# Altium PCB SDC-BSPD-rev2.PcbDoc (part 1 of 2)
Units mm, origin at the board's own origin, x right, y up, seen from the top; angles counter-clockwise.
Board outline 122.75 x 70 mm, 2 copper layers (Top Layer, Bottom Layer); 79 components, 51 nets, 243 pads, 65 vias.
Unrouted connection lines stored in the file: 1.
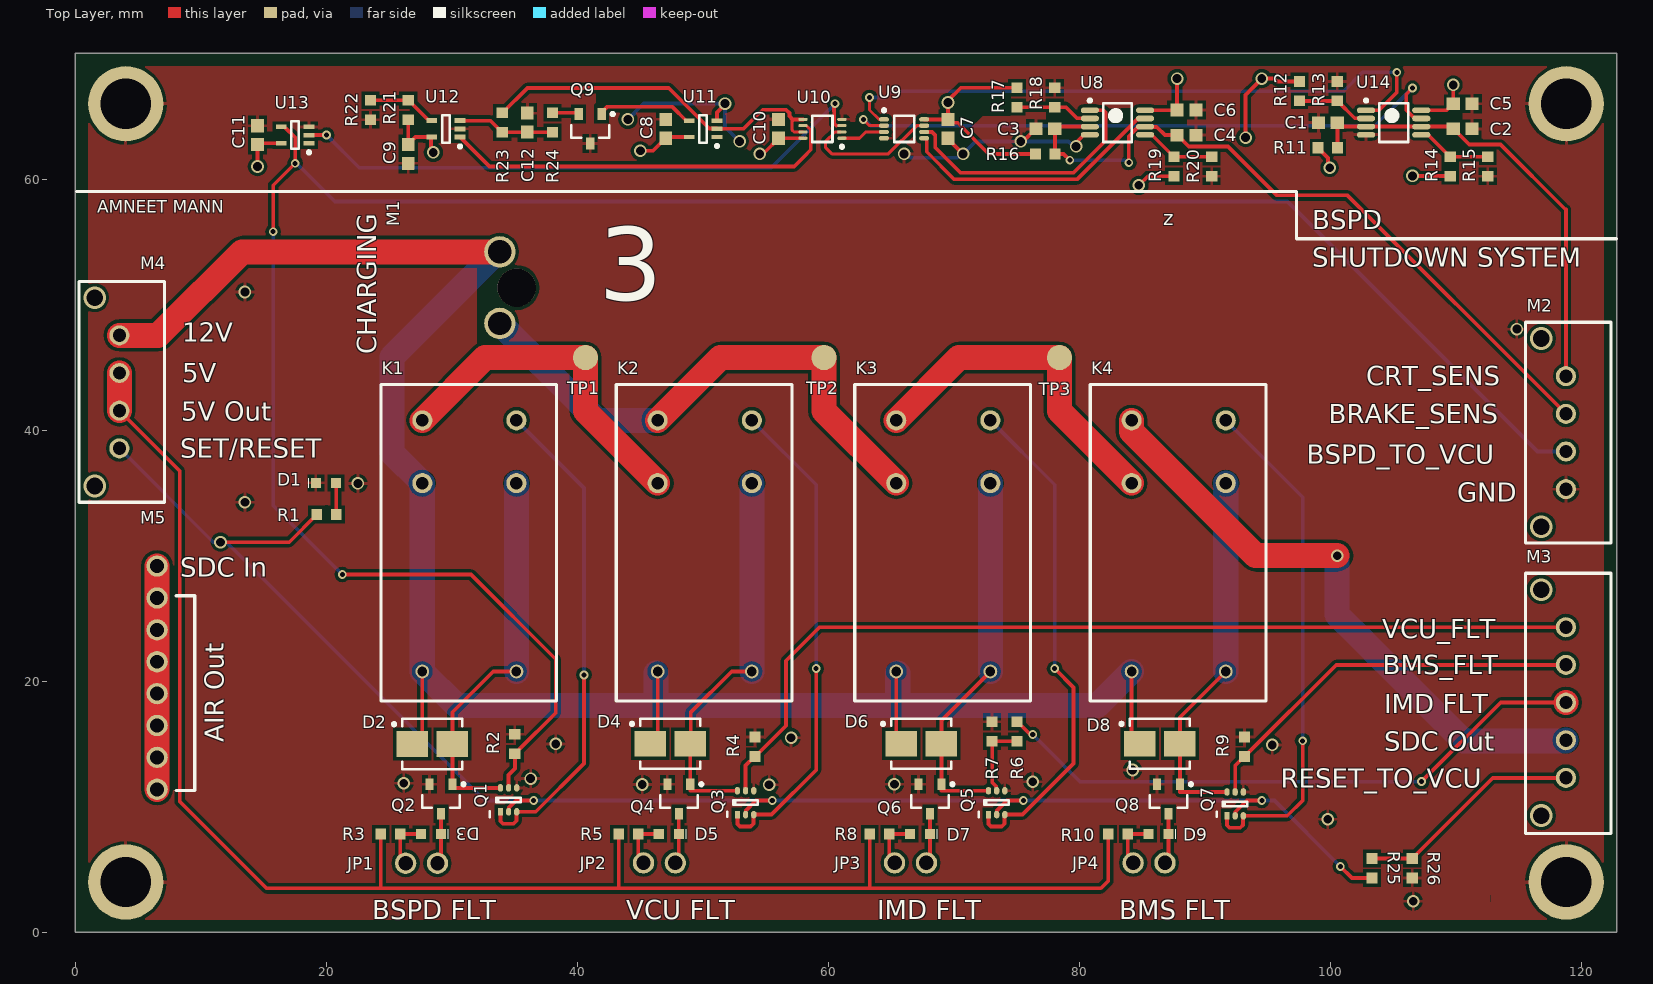
[diagram p0: Top Layer view]
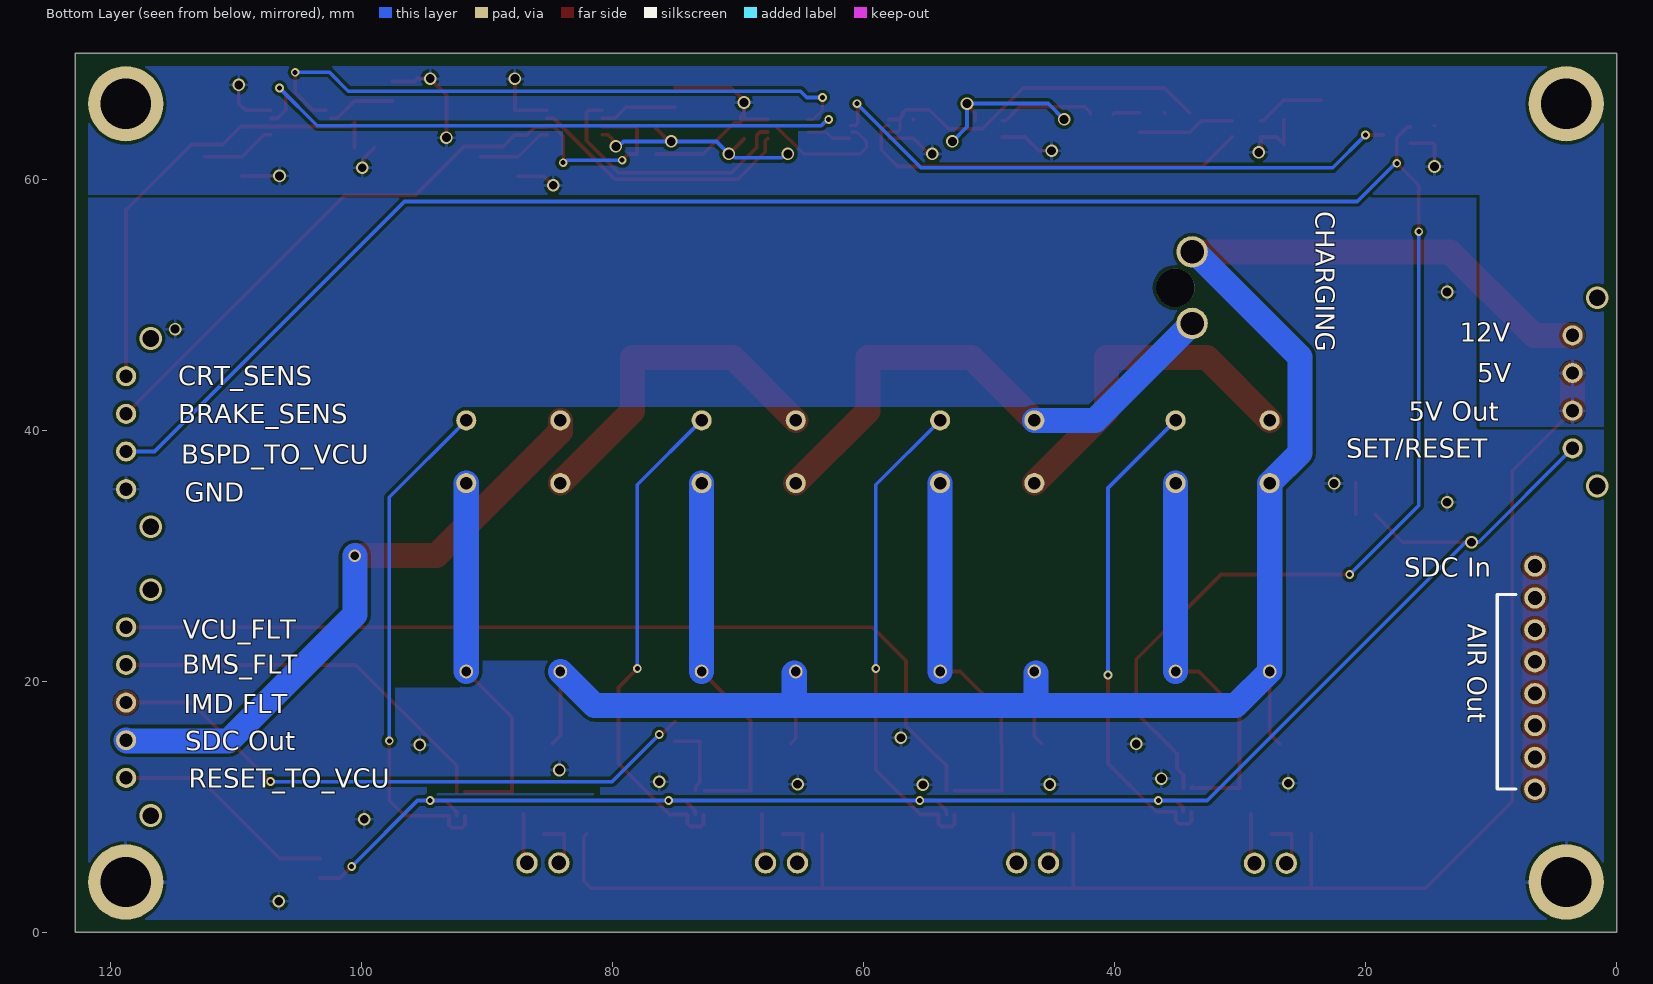
[diagram p1: Bottom Layer view, seen from below]
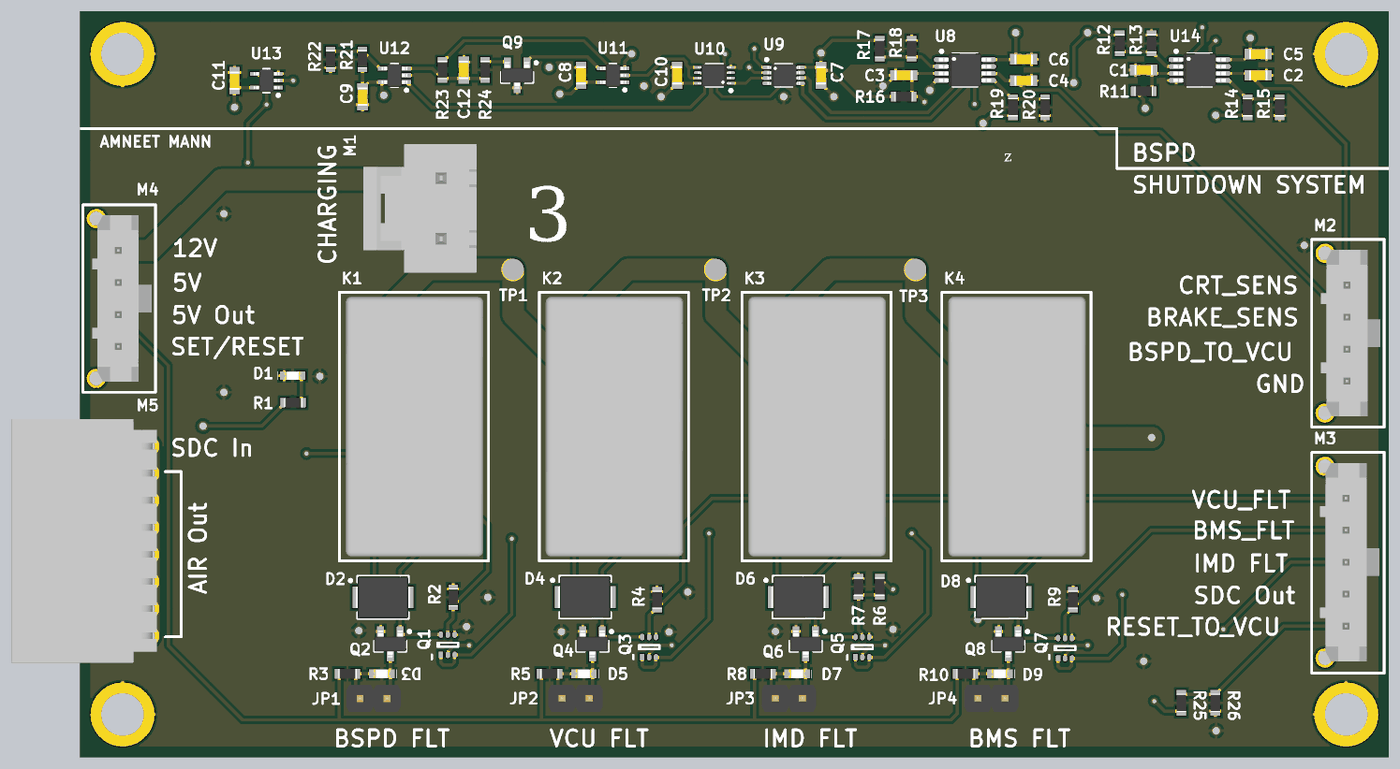
[diagram p2: 3D render of the assembled board from above, using the file's embedded part models]

## Layer stack, top to bottom
Top Solder: solder mask 0.0102, Solder Resist, Dk 3.5
Top Layer: signal copper 0.0356
Dielectric 1: dielectric 0.32, FR-4, Dk 4.8
Bottom Layer: signal copper 0.0356
Bottom Solder: solder mask 0.0102, Solder Resist, Dk 3.5

## Board outline
0,0 0,70 122.75,70 122.75,0

## Design rules (kind name [scope] priority, off if disabled: settings)
Clearance [All] p1: gap=0.254 ignorepadtopadclearanceinfootprint=FALSE except(0: Arc-Arc Arc-Track Arc-Hole Track-Track Track-Hole SMDPad-SMDPad SMDPad-Hole THPad-Hole Via-Hole Fill-Hole Poly-Hole Region-Hole Text-Hole; 0.1: Arc-SMDPad Track-SMDPad)
HoleSize [All] p1: absolutevalues=TRUE maxlimit=4 minlimit=0.025 maxpercent=80.000 minpercent=20.000
MinimumSolderMaskSliver [All] p1: minsoldermaskwidth=0
PolygonConnect [All] p1: connectstyle=Relief reliefconductorwidth=0.254 reliefentries=4 polygonreliefangle="90 Angle" airgapwidth=0.254
RoutingVias [All] p1: holewidth=0.4 width=0.7 viastyle="Through Hole" minholewidth=0.4 minwidth=0.7 maxholewidth=0.4 maxwidth=1
SolderMaskExpansion [All] p1: expansion=0.102
Width [All] p1: maxlimit=2 minlimit=0.25 preferedwidth=0.3
28 further rules are at their usual default settings.

## Classes and differential pairs
component class U_BSPD-rev2: C1 C2 C3 C4 C5 C6 C7 C8 C9 C10 C11 C12 Q9 R11 R12 R13 R14 R15 R16 R17 R18 R19 R20 R21 R22 R23 R24 U8 U9 U10 U11 U12 U13 U14
component class SDC-rev2: D1 D2 D3 D4 D5 D6 D7 D8 D9 JP1 JP2 JP3 JP4 K1 K2 K3 K4 M1 M2 M3 M4 M5 Q1 Q2 Q3 Q4 Q5 Q6 Q7 Q8 R1 R2 R3 R4 R5 R6 R7 R8 R9 R10 R25 R26 TP1 TP2 TP3

## Components (designator, comment, footprint, x,y, rotation, side; value= is the part's Value field where it differs from the comment)
C1 "100nF" CAP-0603 99.75,64.5 r0 top
C2 "100nF" CAP-0603 110.5,64 r180 top
C3 "100nF" CAP-0603 77.25,64 r0 top
C4 "100nF" CAP-0603 88.5,63.5 r180 top
C5 "100nF" CAP-0603 110.5,66 r180 top
C6 "100nF" CAP-0603 88.5,65.5 r180 top
C7 "100nF" CAP-0603 69.5,64 r270 top
C8 "100nF" CAP-0603 47,64 r270 top
C9 "100nF" CAP-0603 26.5,62 r270 top
C10 "100nF" CAP-0603 56,64 r270 top
C11 "100nF" CAP-0603 14.5,63.5 r270 top
C12 "15uF" CAP-0603 36,64.5 r270 top
D1 "Yellow" LED-0603 18.75,35 r0 top
D2 "100V" DO-214AA 28.425,15 r0 top
D3 "Red" LED-0603 29.51,8.621 r180 top
D4 "100V" DO-214AA 47.375,15.025 r0 top
D5 "Red" LED-0603 48.46,8.621 r180 top
D6 "100V" DO-214AA 67.375,15.025 r0 top
D7 "Red" LED-0603 68.46,8.621 r180 top
D8 "100V" DO-214AA 86.375,15.025 r0 top
D9 "Red" LED-0603 87.46,8.621 r180 top
JP1 "732-5315-ND" 2PIN-JP 28.833,5.5 r180 top
JP2 "732-5315-ND" 2PIN-JP 47.783,5.525 r180 top
JP3 "732-5315-ND" 2PIN-JP 67.783,5.525 r180 top
JP4 "732-5315-ND" 2PIN-JP 86.783,5.525 r180 top
K1 "5-1419124-6" "RELAY DPST SDC" 37.825,18.825 r90 top
K2 "5-1419124-6" "RELAY DPST SDC" 56.575,18.825 r90 top
K3 "5-1419124-6" "RELAY DPST SDC" 75.575,18.825 r90 top
K4 "5-1419124-6" "RELAY DPST SDC" 94.325,18.825 r90 top
M1 "2002411112" "2-PIN MOLEX" 33.8,54.2 r0 top
M2 "0436500428" "4-PIN MOLEX" 118.813,39.799 r270 top
M3 "043650052" "5-PIN MOLEX" 118.723,18.299 r270 top
M4 "0436500428" "4-PIN MOLEX" 3.59,43.05 r270 top
M5 "23-0705530112-ND" 8PIN 6.5,29.17 r270 top
Q1 "DMN63D1LDW" DMN63D1LDW 33.85,9.6 r90 top
Q2 "DMN6140L-13DICT-ND" SOT-23-3 29.11,10.616 r270 top
Q3 "DMN63D1LDW" DMN63D1LDW 52.725,9.375 r90 top
Q4 "DMN6140L-13DICT-ND" SOT-23-3 48.06,10.616 r270 top
Q5 "DMN63D1LDW" DMN63D1LDW 72.725,9.375 r90 top
Q6 "DMN6140L-13DICT-ND" SOT-23-3 68.06,10.616 r270 top
Q7 "DMN63D1LDW" DMN63D1LDW 91.725,9.275 r90 top
Q8 "DMN6140L-13DICT-ND" SOT-23-3 87.06,10.616 r270 top
Q9 "BSS138LT3G" SOT-23-3 41,64 r270 top
R1 "240" RES-0603 20,33.275 r180 top
R2 "10K" RES-0603 35,15 r90 top
R3 "240" RES-0603 25.093,7.821 r180 top
R4 "10K" RES-0603 54.125,14.775 r90 top
R5 "240" RES-0603 44.043,7.821 r180 top
R6 "1K" RES-0603 75,16 r270 top
R7 "1K" RES-0603 73,16 r90 top
R8 "240" RES-0603 64.043,7.821 r180 top
R9 "10K" RES-0603 93.125,14.775 r90 top
R10 "240" RES-0603 83.043,7.821 r180 top
R11 "10K" RES-0603 99.75,62.5 r180 top
R12 "1K" RES-0603 97.5,67 r90 top
R13 "3K" RES-0603 100.5,67 r270 top
R14 "9.1K" RES-0603 109.5,61 r270 top
R15 "3K" RES-0603 112.5,61 r90 top
R16 "10K" RES-0603 77.25,62 r180 top
R17 "1K" RES-0603 75,66.5 r90 top
R18 "9.1K" RES-0603 78,66.5 r270 top
R19 "7.5K" RES-0603 87.5,61 r270 top
R20 "3K" RES-0603 90.5,61 r90 top
R21 "1.3K" RES-0603 26.5,65.5 r270 top
R22 "2.2K" RES-0603 23.5,65.5 r90 top
R23 "33K" RES-0603 34,64.5 r270 top
R24 "499" RES-0603 38,64.5 r270 top
R25 "1K" RES-0603 103.275,5.1 r270 top
R26 "2K" RES-0603 106.475,5.1 r90 top
TP1 "Testpoint2" TP2 40.625,45.775 r0 top
TP2 "Testpoint2" TP2 59.625,45.775 r0 top
TP3 "Testpoint2" TP2 78.375,45.775 r0 top
U8 "TLV3202AIDGK" TLV3202AIDGK 83,64.5 r0 top
U9 "NL27WZ32USGOSCT-ND" TSSOP50P310X90-8N 66,64 r0 top
U10 "SN74LVC2G08DCUT" SN74LVC2G08DCU 59.5,64 r180 top
U11 "SN74AHC1G04DCK" SN74AHC1G04DCK 50,64 r180 top
U12 "TLV3201AIDCKR" TLV3201AIDCK 29.5,64 r180 top
U13 "SN74AHC1G04DCK" SN74AHC1G04DCK 17.5,63.5 r180 top
U14 "TLV3202AIDGK" TLV3202AIDGK 105,64.5 r0 top

## Footprints (in the part's own frame and the unit in brackets; to place one, negate y for a bottom-side part, rotate by r counter-clockwise, add the part's x,y. Pads: shape width x height; smd on the part's side, far side on the other; paste and mask are expansions set on the pad)
"2-PIN MOLEX" [mm]
  round 2.5 hole 1.85: 1(0,0) 2(0,-5.7)
  round 3.05 hole 3.05: ""(1.34,-2.85)
  body extent -7.2,-8.72 3.4,3.33, height 17.49
2PIN-JP [mm]
  round 1.7 hole 1.15: 1(0,0) 2(2.54,0)
  body extent -1.24,-1.27 3.84,1.27, height 8.57
"4-PIN MOLEX" [mm]
  round 1.6 hole 1.06: 1(-4.5,-0.09) 2(-1.5,-0.09) 3(1.5,-0.09) 4(4.5,-0.09)
  silkscreen extent -8.8,-3.3 8.8,3.5, body extent -7.82,-2.47 7.83,3.14, height 9.95
"5-PIN MOLEX" [mm]
  round 1.6 hole 1.06: 1(-6,0) 2(-3,0) 3(0,0) 4(3,0) 5(6,0)
  silkscreen extent -10.3,-3.21 10.43,3.59, body extent -9.32,-2.47 9.32,3.14, height 9.95
8PIN [mm]
  round 1.7 hole 1.11: 1(0,0) 2(2.54,0) 3(5.08,0) 4(7.62,0) 5(10.16,0) 6(12.7,0) 7(15.24,0) 8(17.78,0)
  body extent -2.56,-12.89 20.3,0.7, height 7.06
CAP-0603 [mm] "Chip Capacitor, 2-Leads, Body 1.60x0.80mm, IPC Medium Density"
  rect 1.05x1 smd: 1(-0.75,0) 2(0.75,0)
  body extent -0.87,-0.48 0.87,0.48, height 0.9
DMN63D1LDW [mm]
  rect 0.6x0.42 smd: 1(0,0)
  oval 0.6x0.42 smd: 2(0,-0.65) 3(0,-1.3) 4(1.9,-1.3) 5(1.9,-0.65) 6(1.9,0)
  silkscreen extent 0.76,-1.63 1.13,0.33
DO-214AA [mm] "Molded Diode, 2-Leads, Body 4.40x3.62mm, IPC Medium Density"
  rect 2.5x2.05 smd: 1(-1.6,0) 2(1.6,0)
  silkscreen extent -3.17,-2 2.4,2, body extent -2.6,-1.97 2.6,1.97, height 2.41
LED-0603 [mm]
  rect 0.8x0.8 smd: 1(2,0.8) 2(0.4,0.8)
  silkscreen extent -0.18,0.43 -0.18,1.17, body extent 0.4,0.4 2,1.2, height 0.7
"RELAY DPST SDC" [mm]
  round 1.1 hole 0.762: 1(1.95,2.7) 6(1.95,10.2)
  round 1.6 hole 1: 2(16.95,2.7) 3(21.95,2.7) 4(21.95,10.2) 5(16.95,10.2)
  silkscreen extent -0.4,-0.5 24.8,13.5, body extent 0,0 24.4,12.9, height 24.51
RES-0603 [mm] "Chip Resistor, 2-Leads, Body 1.60x0.80mm, IPC Medium Density"
  rect 0.85x0.9 smd: 1(-0.775,0) 2(0.775,0)
  body extent -0.85,-0.45 0.85,0.45, height 0.55
SN74AHC1G04DCK [mm] "SOT23, 5-Leads, Body 2.00x2.10mm, Pitch 0.65mm, IPC Medium Density"
  rect 0.85x0.35 smd: 1(-1.1,0.65) 2(-1.1,0) 3(-1.1,-0.65) 4(1.1,-0.65) 5(1.1,0.65)
  silkscreen extent -1.23,-1.1 0.3,1.5, body extent -1.2,-1.07 1.2,1.07, height 1.1
SN74LVC2G08DCU [mm] "TSSOP, 8-Leads, Body 2.00x2.30mm, Pitch 0.50mm, IPC Medium Density"
  oval 0.75x0.25 smd: 1(-1.55,0.75) 2(-1.55,0.25) 3(-1.55,-0.25) 4(-1.55,-0.75) 5(1.55,-0.75) 6(1.55,-0.25) 7(1.55,0.25) 8(1.55,0.75)
  silkscreen extent -1.68,-1.05 0.8,1.55, body extent -1.55,-1.05 1.55,1.05, height 0.9
SOT-23-3 [mm] "SOT23, 3-Leads, Body 2.90x2.40mm, Pitch 0.92mm, IPC Medium Density"
  rect 0.95x0.65 smd: 1(-1.175,0.915) 2(1.175,0) 3(-1.175,-0.915)
  silkscreen extent -1.3,-1.5 0.7,1.91, body extent -1.25,-1.5 1.25,1.5, height 1.1
TLV3201AIDCK [mm] "SOT23, 5-Leads, Body 2.00x2.10mm, Pitch 0.65mm, IPC Medium Density"
  rect 0.85x0.4 smd: 1(-1.125,0.65) 2(-1.125,0) 3(-1.125,-0.65) 4(1.125,-0.65) 5(1.125,0.65)
  silkscreen extent -1.25,-1.1 0.3,1.52, body extent -1.2,-1.07 1.2,1.07, height 1.1
TLV3202AIDGK [mm] "TSOP, 8-Leads, Body 3.00x3.00mm, Pitch 0.65mm, IPC Medium Density"
  oval 1.45x0.45 smd: 1(-2.2,0.975) 2(-2.2,0.325) 3(-2.2,-0.325) 4(-2.2,-0.975) 5(2.2,-0.975) 6(2.2,-0.325) 7(2.2,0.325) 8(2.2,0.975)
  silkscreen extent -2.32,-1.55 1.15,1.87, body extent -2.45,-1.55 2.45,1.55, height 1.1
TP2 [mm]
  round 2 smd: 1(0,0)
TSSOP50P310X90-8N [mm] "TSSOP, 8-Leads, Body 2.00x2.30mm, Pitch 0.50mm, IPC Medium Density"
  oval 0.8x0.35 smd: 1(-1.6,0.75) 2(-1.6,0.25) 3(-1.6,-0.25) 4(-1.6,-0.75) 5(1.6,-0.75) 6(1.6,-0.25) 7(1.6,0.25) 8(1.6,0.75)
  silkscreen extent -1.72,-1.05 0.8,1.6, body extent -1.55,-1.05 1.55,1.05, height 0.9

## Part data
C1 C2 C3 C4 C5 C6 C7 C8 C9 C10 C11: library part CL10B104KB8NNNL, "CAP CER 0.1UF 50V X7R 0603", Capacitance=10uF, Case Code (Imperial)=0805, Case Code (Metric)=2012, Dielectric=X5R, Manufacturer=Samsung, Manufacturer Part Number=CL21A106KPFNNNG, Max Operating Temperature=85°C, Min Operating Temperature=-55°C, Package Quantity=3000, Supplier Part Number 1=1276-6456-1-ND, Tolerance=10%, Voltage=10V, Case/Package=0805, ComponentLink1Description=http://www1.futureelectronics.com/doc/SAMSUNG/CL21A106KPFNNNG.pdf?src-supplier=Future+Electronics, ComponentLink1URL=http://www1.futureelectronics.com/doc/SAMSUNG/CL21A106KPFNNNG.pdf?src-supplier=Future+Electronics, ComponentLink2Description=https://www.verical.com/server-webapp/html/getDatasheet?partID=640497&src-supplier=Verical, ComponentLink2URL=https://www.verical.com/server-webapp/html/getDatasheet?partID=640497&src-supplier=Verical, Depth=1.25mm, Height=1.25mm, Lead Free="Lead Free", Length=2mm, Mount="Surface Mount", Packaging="Tape and Reel", Pricing 1="1=0.15, 10=0.104, 100=0.0489, 500=0.03428, 1000=0.02837 (USD)", Radiation Hardening=No, Stock 1=0, Supplier 1=Digi-Key, Termination=Wraparound, Thickness=0.053inch, Voltage Rating=10V, Width=0.049inch
C12: library part C1608X5R0J156M080AC, "CAP CER 15UF 6.3V X5R 0603"
D1: library part LED-Yellow, "LED YELLOW CLEAR 0603 SMD", Case Code (Imperial)=0603, Case Code (Metric)=1608, Forward Current=30mA, Forward Voltage=2V, Manufacturer="Wurth Electronics", Manufacturer Part Number=150060YS75000, Max Operating Temperature=85°C, Min Operating Temperature=-40°C, Package Quantity=4000, Supplier Part Number 1=732-4981-6-ND, Test Current=20mA, Case/Package=0603, Color=Yellow, ComponentLink1Description=http://katalog.we-online.de/led/datasheet/150060YS75000.pdf?src-supplier=Newark, ComponentLink1URL=http://katalog.we-online.de/led/datasheet/150060YS75000.pdf?src-supplier=Newark, ComponentLink2Description=https://katalog.we-online.de/led/datasheet/150060YS75000.pdf?src-supplier=Digi-Key, ComponentLink2URL=https://katalog.we-online.de/led/datasheet/150060YS75000.pdf?src-supplier=Digi-Key, ComponentLink3Description=http://www.farnell.com/datasheets/1911348.pdf?src-supplier=Element14, ComponentLink3URL=http://www.farnell.com/datasheets/1911348.pdf?src-supplier=Element14, ComponentLink4Description=https://www.distrelec.biz/Web/Downloads/_t/ds/150060YS75000_eng_tds.pdf?mime=application%2Fpdf&src-supplier=Distrelec, ComponentLink4URL=https://www.distrelec.biz/Web/Downloads/_t/ds/150060YS75000_eng_tds.pdf?mime=application%2Fpdf&src-supplier=Distrelec, ComponentLink5Description=http://www.produktinfo.conrad.com/datenblaetter/750000-774999/759432-da-01-en-CHIPLED_0603_W_KL_GELB_150060YS75000.pdf?src-supplier=Conrad, ComponentLink5URL=http://www.produktinfo.conrad.com/datenblaetter/750000-774999/759432-da-01-en-CHIPLED_0603_W_KL_GELB_150060YS75000.pdf?src-supplier=Conrad, Dominant Wavelength=590nm, Height=0.7mm, Length=1.6mm, Lens Style=Clear,Rectangular, Luminous Intensity=120mcd, Mount="Surface Mount", Packaging="Tape and Reel", Pricing 1="1=0.14, 50=0.133, 100=0.114, 500=0.099 (USD)", REACH SVHC=Unknown, Stock 1=78, Supplier 1=Digi-Key, Viewing Angle=140°, Wavelength=590nm, Width=0.8mm
D2 D4 D6 D8: library part Diode-600V-5A, "DIODE GEN PURP 600V 5A SMB", Average Rectified Current=5A, Case/Package=SMB, Manufacturer=MCC, Manufacturer Part Number=SK510B-LTP, Supplier Part Number 1=1655-1530-6-ND, ComponentLink1Description=http://components.arrow.com/part/dataview/49208388S301832N2022?src-supplier=Arrow, ComponentLink1URL=http://components.arrow.com/part/dataview/49208388S301832N2022?src-supplier=Arrow, ComponentLink2Description=http://www.mccsemi.com/up_pdf/SK52B-L-SK520B-L(DO-214AA).pdf?src-supplier=Digi-Key, ComponentLink2URL=http://www.mccsemi.com/up_pdf/SK52B-L-SK520B-L(DO-214AA).pdf?src-supplier=Digi-Key, ComponentLink3Description=http://www.smc-diodes.com/propdf/SD560B%20N1412%20REV.D.pdf?src-supplier=Digi-Key, ComponentLink3URL=http://www.smc-diodes.com/propdf/SD560B%20N1412%20REV.D.pdf?src-supplier=Digi-Key, Max Reverse Voltage (DC)=100V, Mount="Surface Mount", Number of Pins=2, Packaging="Tape and Reel", Pricing 1="1=0.4, 10=0.3, 25=0.2628, 100=0.1427, 250=0.14192, 500=0.11638, 1000=0.08634 (USD)", Stock 1=68219, Supplier 1=Digi-Key
D3 D5 D7 D9: library part LED-Red-Bright, "LED RED CLEAR 0603 SMD", Case Code (Imperial)=0603, Case Code (Metric)=1608, Forward Voltage=2.2V, Lens Color=Clear, Manufacturer=Inolux, Manufacturer Part Number=IN-S63ATR, Supplier Part Number 1=1830-1065-6-ND, Test Current=20mA, Case/Package=0603, Color=Red, ComponentLink1Description=http://www.inolux-corp.com/datasheet/SMDLED/Mono%20Color%20Top%20View/IN-S63AT%20Series_V1.1.pdf?src-supplier=Digi-Key, ComponentLink1URL=http://www.inolux-corp.com/datasheet/SMDLED/Mono%20Color%20Top%20View/IN-S63AT%20Series_V1.1.pdf?src-supplier=Digi-Key, Dominant Wavelength=622nm, Height=0.4mm, Length=1.6mm, Lens Size=0.8mm, Lens Style=Flat, Lens Transparency=Clear, Luminous Intensity=45mcd, Mount="Surface Mount", Packaging="Cut Tape", Pricing 1="1=0.33, 10=0.24, 100=0.1136, 500=0.07576, 1000=0.05934 (USD)", Stock 1=6977, Supplier 1=Digi-Key, Viewing Angle=120°, Width=0.8mm
JP1 JP2 JP3 JP4: library part 2PIN-TEST, "CONN HEADER VERT 2POS 2.54MM"
K1 K2 K3 K4: "General Purpose Relay, Osa Series, Power, Non Latching, Dpst-No, 12 Vdc, 3 A Rohs Compliant: Yes", Coil Current=45mA, Coil Power=600mW, Coil Resistance=270R, Coil Voltage (DC)=12V, Contact Current Rating=3A, Contact Voltage Rating (AC)=240V, Manufacturer="TE Connectivity", Max Operating Temperature=60°C, Min Operating Temperature=-30°C, Package Quantity=1000, Supplier Part Number 1=OSA-SS-212DM3,000-ND, Category=Relays, Coil Type=Non-Latching, ComponentLink1Description=http://www.farnell.com/datasheets/1652820.pdf?src-supplier=Farnell, ComponentLink1URL=http://www.farnell.com/datasheets/1652820.pdf?src-supplier=Farnell, ComponentLink2Description=http://www.farnell.com/cad/1652820.pdf?src-supplier=Element14, ComponentLink2URL=http://www.farnell.com/cad/1652820.pdf?src-supplier=Element14, ComponentLink3Description=http://www.te.com/commerce/DocumentDelivery/DDEController?Action=srchrtrv&DocNm=5-1419124-6&DocType=Customer+Drawing&DocLang=English&src-supplier=Digi-Key, ComponentLink3URL=http://www.te.com/commerce/DocumentDelivery/DDEController?Action=srchrtrv&DocNm=5-1419124-6&DocType=Customer+Drawing&DocLang=English&src-supplier=Digi-Key, Contact Material=Silver, ELV=Compliant, Height=0.976inch, Length=24.4mm, Manufacturer Part Number=5-1419124-6, Mount="Through Hole", Operate Time=20ms, Packaging=Box, Pricing 1="1=2.54, 10=2.385, 25=2.1204, 50=2.0142, 100=1.9083, 250=1.69624, 500=1.59022, 1000=1.48421, 5000=1.4312 (USD)", REACH SVHC=Unknown, Relay Type="General Purpose", Release Time=10ms, Stock 1=2593, Supplier 1=Digi-Key, Termination=PCB, Throw Configuration=DPST, Weight=13g, Width=12.9mm
M1: "CONN HEADER VERT 2POS 5.7MM, 12-16AWG"
M2 M4: "4 PIN HDR, 3MM PITCH, 18-30 AWG", Color=Black, Manufacturer=Molex, Max Operating Temperature=105°C, Min Operating Temperature=-40°C, Package Quantity=2040, Supplier Part Number 1=WM10669-ND, Category="Connectors, Interconnects", ComponentLink1Description=http://www.molex.com/pdm_docs/sd/436500428_sd.pdf?src-supplier=Digi-Key, ComponentLink1URL=http://www.molex.com/pdm_docs/sd/436500428_sd.pdf?src-supplier=Digi-Key, ComponentLink2Description=http://www.molex.com/webdocs/datasheets/pdf/en-us/0436500428_PCB_HEADERS.pdf?src-supplier=Avnet, ComponentLink2URL=http://www.molex.com/webdocs/datasheets/pdf/en-us/0436500428_PCB_HEADERS.pdf?src-supplier=Avnet, Connector Type="Male Pin", Contact Material=Brass, Contact Plating=Gold, Depth=5.57mm, Fastening Type=Ramp, Housing Material=Polymer, Length=15.65mm, Manufacturer Part Number=0436500428, Mount="Through Hole", Number of Contacts=4, Number of Ports=1, Number of Positions=4, Number of Rows=1, Number of Terminals=4, Orientation=Straight, Packaging=Tray, Pitch=3mm, Pricing 1="1=1.44, 10=1.265, 100=1.0916, 500=0.89316, 1000=0.79392, 5000=0.69468, 10000=0.65995 (USD)", Stock 1=1193, Supplier 1=Digi-Key, Termination=Solder
M3: library part 0436500528, "CONN HEADER VERT 5POS 3MM"
M5: library part 8PIN, "CONN HEADER R/A 8POS 2.54MM", Color=Black, Contact Resistance=30mR, Current Rating=3A, Flammability Rating="UL94 V-0", Insulation Resistance=1GR, Manufacturer=Molex, Manufacturer Part Number=70553-0112, Max Operating Temperature=105°C, Min Operating Temperature=-40°C, Package Quantity=1, Voltage Rating=250V, ComponentLink1Description=https://www.molex.com/pdm_docs/ps/PS-70400.pdf?src-supplier=Digi-Key, ComponentLink1URL=https://www.molex.com/pdm_docs/ps/PS-70400.pdf?src-supplier=Digi-Key, ComponentLink2Description=http://www.mouser.com/ds/2/276/0705530112_PCB_HEADERS-172840.pdf?src-supplier=Mouser, ComponentLink2URL=http://www.mouser.com/ds/2/276/0705530112_PCB_HEADERS-172840.pdf?src-supplier=Mouser, Connector Type="Male Pin", Contact Material=Bronze, Contact Mating Length=0.24inch, Contact Plating=Gold, ELV=Compliant, Glow Wire Compliant=Non-compliant, Housing Material=Thermoplastic, Material=Brass, Mount="Through Hole", Number of Circuits=8, Number of Contacts=8, Number of Positions=8, Number of Rows=1, Orientation="Right Angle", Packaging=Rail/Tube, Pitch=2.54mm, Pricing 1="1=2.43, 10=2.205, 100=1.89, 500=1.575, 1000=1.35, 5000=1.197, 10000=1.17 (USD)", Stock 1=1363, Supplier 1=Digi-Key, Supplier Part Number 1=23-0705530112-ND, Termination=Solder, Voltage Rating (DC)=250V
Q1 Q3 Q5 Q7: "MOSFET 2N-CH 60V 0.25A SOT363", Case/Package=SOT-363, Continuous Drain Current (ID)=170mA, Drain to Source Voltage (Vdss)=60V, Input Capacitance=17pF, Manufacturer=Toshiba, Manufacturer Part Number=SSM6N7002CFU,LF, Max Power Dissipation=285mW, Supplier Part Number 1=SSM6N7002CFULFDKR-ND, Category="Discrete Semiconductor Products", ComponentLink1Description=https://toshiba.semicon-storage.com/info/docget.jsp?did=29875&prodName=SSM6N7002CFU&src-supplier=Digi-Key, ComponentLink1URL=https://toshiba.semicon-storage.com/info/docget.jsp?did=29875&prodName=SSM6N7002CFU&src-supplier=Digi-Key, ComponentLink2Description=http://www.mouser.com/ds/2/408/SSM6N7002CFU_datasheet_en_20150413-736631.pdf?src-supplier=Mouser, ComponentLink2URL=http://www.mouser.com/ds/2/408/SSM6N7002CFU_datasheet_en_20150413-736631.pdf?src-supplier=Mouser, FET Type="2 N-Channel", Mount="Surface Mount", Packaging="Tape and Reel", Pricing 1="1=0.27, 10=0.221, 100=0.0906, 500=0.0756, 1000=0.05253 (USD)", Rds On Max=3.9R, Stock 1=13946, Supplier 1=Digi-Key
Q2 Q4 Q6 Q8: library part N-FET-60V-1.6A, "MOSFET N-CH 60V 1.6A SOT23", Case/Package=TO-236-3, Continuous Drain Current (ID)=1.6A, Drain to Source Voltage (Vdss)=60V, Input Capacitance=315pF, Manufacturer=Diodes, Manufacturer Part Number=DMN6140L-13, Max Operating Temperature=150°C, Max Power Dissipation=700mW, Min Operating Temperature=-55°C, Package Quantity=10000, Supplier Part Number 1=DMN6140L-13DIDKR-ND, ComponentLink1Description=https://www.diodes.com/assets/Datasheets/DMN6140L.pdf?src-supplier=Digi-Key, ComponentLink1URL=https://www.diodes.com/assets/Datasheets/DMN6140L.pdf?src-supplier=Digi-Key, Mount="Surface Mount", Packaging="Cut Tape", Pricing 1="1=0.34, 10=0.256, 25=0.224, 100=0.1217, 250=0.12104, 500=0.09926, 1000=0.07365, 2500=0.06468, 5000=0.05924 (USD)", Rds On Max=140mR, Stock 1=274948, Supplier 1=Digi-Key
Q9: "MOSFET N-CH 50V 200MA SOT-23", Case/Package=SOT-23-3, Continuous Drain Current (ID)=200mA, Drain to Source Breakdown Voltage=50V, Drain to Source Resistance=3.5R, Gate to Source Voltage (Vgs)=20V, Input Capacitance=50pF, Manufacturer="ON Semiconductor", Max Operating Temperature=150°C, Max Power Dissipation=225mW, Min Operating Temperature=-55°C, Package Quantity=1, Supplier Part Number 1=BSS138LT3GOSCT-ND, Threshold Voltage=500mV, ComponentLink1Description=DigiKey, ComponentLink1URL=https://www.digikey.ca/product-detail/en/BSS138LT3G/BSS138LT3GOSCT-ND/2120566/?itemSeq=274498102, Current Rating=200mA, Drain to Source Voltage (Vdss)=50V, Element Configuration=Single, Halogen Free="Halogen Free", Height=0.94mm, Lead Free="Lead Free", Length=2.9mm, Manufacturer Part Number=BSS138LT3G, Nominal Vgs=500mV, Number of Elements=1, Number of Pins=3, On-State Resistance=3.5R, Packaging="Tape and Reel", Power Dissipation=225mW, Pricing 1="1=0.45, 10=0.408, 100=0.2284, 500=0.12234, 1000=0.0832 (USD)", Radiation Hardening=No, Rds On Max=3.5R, REACH SVHC="No SVHC", Stock 1=195647, Supplier 1=Digi-Key, Turn-Off Delay Time=20ns, Turn-On Delay Time=20ns, Voltage Rating (DC)=50V, Width=1.3mm
R1: library part ESR03EZPJ241, "RES SMD 240 OHM 5% 1/4W 0603", Case/Package=0603, Case Code (Metric)=1608, Manufacturer=Vishay, Manufacturer Part Number=CRCW0603220RJNEA, Max Operating Temperature=155°C, Max Power Dissipation=100mW, Min Operating Temperature=-55°C, Package Quantity=1, Resistance=220R, Supplier Part Number 1=541-220GCT-ND, Temperature Coefficient=200ppm/°C, Tolerance=5%, Voltage Rating=75V, Case Code (Imperial)=0603, Category=Resistors, ComponentLink1Description=http://www.vishay.com/docs/20035/dcrcwe3.pdf?src-supplier=Digi-Key, ComponentLink1URL=http://www.vishay.com/docs/20035/dcrcwe3.pdf?src-supplier=Digi-Key, ComponentLink2Description=http://www.vishay.com/docs/20035/dcrcwe3.pdf?src-supplier=Avnet, ComponentLink2URL=http://www.vishay.com/docs/20035/dcrcwe3.pdf?src-supplier=Avnet, ComponentLink3Description=http://www.alliedelec.com/m/d/0c934d6939ccefa68dbe0b96d821c8cf.pdf?src-supplier=Allied+Electronics, ComponentLink3URL=http://www.alliedelec.com/m/d/0c934d6939ccefa68dbe0b96d821c8cf.pdf?src-supplier=Allied+Electronics, ComponentLink4Description=http://www.farnell.com/datasheets/2045673.pdf?src-supplier=Element14, ComponentLink4URL=http://www.farnell.com/datasheets/2045673.pdf?src-supplier=Element14, ComponentLink5Description=http://www.mouser.com/ds/2/427/dcrcwe3-109170.pdf?src-supplier=Mouser, ComponentLink5URL=http://www.mouser.com/ds/2/427/dcrcwe3-109170.pdf?src-supplier=Mouser, Composition="Thick Film", Contact Plating=Tin, Depth=0.85mm, Features="Automotive AEC-Q200", Height=0.45mm, Length=1.55mm, Military Standard=Not, Mount="Surface Mount", Number of Terminations=2, Packaging="Tape and Reel", Power Rating=100mW, Pricing 1="1=0.1, 10=0.031, 100=0.0125, 1000=0.00562, 2500=0.00488 (USD)", Radiation Hardening=No, REACH SVHC=Unknown, Stock 1=171552, Supplier 1=Digi-Key, Termination=SMD/SMT, Weight=7.1E-05oz, Width=0.033inch, Working Voltage=75V
R2 R4 R9 R11 R16: library part CRCW060310K0FKEA, "RES SMD 10K OHM 1% 1/10W 0603", Case Code (Imperial)=0603, Case Code (Metric)=1608, Manufacturer=Vishay, Max Operating Temperature=155°C, Max Power Dissipation=100mW, Min Operating Temperature=-55°C, Package Quantity=10, Resistance=10kR, Supplier Part Number 1=541-10.0KHCT-ND, Temperature Coefficient=100ppm/°C, Tolerance=1%, Voltage Rating=75V, Case/Package=0603, Category=Resistors, ComponentLink1Description=http://www.vishay.com/docs/20008/dcrcw.pdf?src-supplier=Avnet+Europe, ComponentLink1URL=http://www.vishay.com/docs/20008/dcrcw.pdf?src-supplier=Avnet+Europe, ComponentLink2Description=https://www.verical.com/server-webapp/html/getDatasheet?partID=86831&src-supplier=Verical, ComponentLink2URL=https://www.verical.com/server-webapp/html/getDatasheet?partID=86831&src-supplier=Verical, ComponentLink3Description=http://www.farnell.com/datasheets/2310790.pdf?src-supplier=Allied+Electronics, ComponentLink3URL=http://www.farnell.com/datasheets/2310790.pdf?src-supplier=Allied+Electronics, ComponentLink4Description=http://www.vishay.com/docs/20035/dcrcwe3.pdf?src-supplier=Digi-Key, ComponentLink4URL=http://www.vishay.com/docs/20035/dcrcwe3.pdf?src-supplier=Digi-Key, ComponentLink5Description=http://www.farnell.com/datasheets/2310790.pdf?src-supplier=Mouser, ComponentLink5URL=http://www.farnell.com/datasheets/2310790.pdf?src-supplier=Mouser, ComponentLink6Description=http://www.farnell.com/datasheets/2310790.pdf?src-supplier=Element14, ComponentLink6URL=http://www.farnell.com/datasheets/2310790.pdf?src-supplier=Element14, ComponentLink7Description=http://www.farnell.com/datasheets/2310790.pdf?src-supplier=Avnet, ComponentLink7URL=http://www.farnell.com/datasheets/2310790.pdf?src-supplier=Avnet, ComponentLink8Description=http://www.vishay.com/docs/20035/dcrcwe3.pdf?src-supplier=Future+Electronics, ComponentLink8URL=http://www.vishay.com/docs/20035/dcrcwe3.pdf?src-supplier=Future+Electronics, ComponentLink9Description=http://uk.rs-online.com/webdocs/0d98/0900766b80d98afc.pdf?src-supplier=RSComponents, ComponentLink9URL=http://uk.rs-online.com/webdocs/0d98/0900766b80d98afc.pdf?src-supplier=RSComponents, ComponentLink10Description=http://www.farnell.com/datasheets/2310790.pdf?src-supplier=Distrelec, ComponentLink10URL=http://www.farnell.com/datasheets/2310790.pdf?src-supplier=Distrelec, Composition="Thick Film", Contact Plating=Tin,Lead, Depth=0.85mm, Features="Automotive AEC-Q200", Height=0.45mm, Lead Free="Lead Free", Length=1.55mm, Manufacturer Part Number=CRCW060310K0FKEA, Military Standard=Not, Number of Pins=2, Number of Terminations=2, Packaging="Tape and Reel", Power Rating=100mW, Pricing 1="1=0.1, 10=0.034, 100=0.0139, 1000=0.00623, 2500=0.0054 (USD)", Radiation Hardening=No, REACH SVHC=Unknown, Stock 1=1434373, Supplier 1=Digi-Key, Termination=SMD/SMT, Voltage Rating (DC)=75V, Weight=7.1E-05oz, Width=0.033inch
R3 R5 R8 R10 R25: library part ESR03EZPJ241, "RES SMD 240 OHM 5% 1/4W 0603", Case Code (Imperial)=0603, Case Code (Metric)=1608, Manufacturer=Vishay, Manufacturer Part Number=CRCW0603220RJNEA, Max Operating Temperature=155°C, Max Power Dissipation=100mW, Min Operating Temperature=-55°C, Package Quantity=1, Resistance=220R, Supplier Part Number 1=541-220GCT-ND, Temperature Coefficient=200ppm/°C, Tolerance=5%, Voltage Rating=75V, Case/Package=0603, Category=Resistors, ComponentLink1Description=http://www.vishay.com/docs/20035/dcrcwe3.pdf?src-supplier=Digi-Key, ComponentLink1URL=http://www.vishay.com/docs/20035/dcrcwe3.pdf?src-supplier=Digi-Key, ComponentLink2Description=http://www.vishay.com/docs/20035/dcrcwe3.pdf?src-supplier=Avnet, ComponentLink2URL=http://www.vishay.com/docs/20035/dcrcwe3.pdf?src-supplier=Avnet, ComponentLink3Description=http://www.alliedelec.com/m/d/0c934d6939ccefa68dbe0b96d821c8cf.pdf?src-supplier=Allied+Electronics, ComponentLink3URL=http://www.alliedelec.com/m/d/0c934d6939ccefa68dbe0b96d821c8cf.pdf?src-supplier=Allied+Electronics, ComponentLink4Description=http://www.farnell.com/datasheets/2045673.pdf?src-supplier=Element14, ComponentLink4URL=http://www.farnell.com/datasheets/2045673.pdf?src-supplier=Element14, ComponentLink5Description=http://www.mouser.com/ds/2/427/dcrcwe3-109170.pdf?src-supplier=Mouser, ComponentLink5URL=http://www.mouser.com/ds/2/427/dcrcwe3-109170.pdf?src-supplier=Mouser, Composition="Thick Film", Contact Plating=Tin, Depth=0.85mm, Features="Automotive AEC-Q200", Height=0.45mm, Length=1.55mm, Military Standard=Not, Mount="Surface Mount", Number of Terminations=2, Packaging="Tape and Reel", Power Rating=100mW, Pricing 1="1=0.1, 10=0.031, 100=0.0125, 1000=0.00562, 2500=0.00488 (USD)", Radiation Hardening=No, REACH SVHC=Unknown, Stock 1=171552, Supplier 1=Digi-Key, Termination=SMD/SMT, Weight=7.1E-05oz, Width=0.033inch, Working Voltage=75V
R6 R7 R12 R17: library part CRCW06031K00FKEA, "RES SMD 1K OHM 1% 1/10W 0603", Case Code (Imperial)=0603, Case Code (Metric)=1608, Manufacturer="Vishay Dale", Max Operating Temperature=155°C, Max Power Dissipation=100mW, Min Operating Temperature=-55°C, Package Quantity=10, Resistance=1kR, Supplier Part Number 1=541-1.00KHCT-ND, Temperature Coefficient=100ppm/°C, Tolerance=1%, Voltage Rating=75V, Case/Package=0603, Category=Resistors, ComponentLink1Description=http://www.vishay.com/docs/20035/dcrcwe3.pdf?src-supplier=Digi-Key, ComponentLink1URL=http://www.vishay.com/docs/20035/dcrcwe3.pdf?src-supplier=Digi-Key, ComponentLink2Description=http://uk.rs-online.com/webdocs/0d98/0900766b80d98afc.pdf?src-supplier=RSComponents, ComponentLink2URL=http://uk.rs-online.com/webdocs/0d98/0900766b80d98afc.pdf?src-supplier=RSComponents, ComponentLink3Description=http://www.vishay.com/docs/20035/dcrcwe3.pdf?src-supplier=Avnet, ComponentLink3URL=http://www.vishay.com/docs/20035/dcrcwe3.pdf?src-supplier=Avnet, ComponentLink4Description=http://www.vishay.com/docs/20035/dcrcwe3.pdf?src-supplier=Avnet+Asia, ComponentLink4URL=http://www.vishay.com/docs/20035/dcrcwe3.pdf?src-supplier=Avnet+Asia, ComponentLink5Description=http://www.farnell.com/datasheets/2310790.pdf?src-supplier=Element14, ComponentLink5URL=http://www.farnell.com/datasheets/2310790.pdf?src-supplier=Element14, ComponentLink6Description=https://www.distrelec.biz/Web/Downloads/a_/en/flD-CRCW-e3_data_en.pdf?mime=application%2Fpdf&src-supplier=Distrelec, ComponentLink6URL=https://www.distrelec.biz/Web/Downloads/a_/en/flD-CRCW-e3_data_en.pdf?mime=application%2Fpdf&src-supplier=Distrelec, ComponentLink7Description=http://www.vishay.com/docs/20035/dcrcwe3.pdf?src-supplier=Future+Electronics, ComponentLink7URL=http://www.vishay.com/docs/20035/dcrcwe3.pdf?src-supplier=Future+Electronics, ComponentLink8Description=http://www.vishay.com/docs/20035/dcrcwe3.pdf?src-supplier=Avnet+Europe, ComponentLink8URL=http://www.vishay.com/docs/20035/dcrcwe3.pdf?src-supplier=Avnet+Europe, Composition="Thick Film", Contact Plating=Tin, Depth=0.85mm, Features="Automotive AEC-Q200", Height=0.45mm, Lead Free="Lead Free", Length=1.55mm, Manufacturer Part Number=CRCW06031K00FKEA, Military Standard=Not, Mount="Surface Mount", Number of Pins=2, Number of Terminations=2, Packaging="Tape and Reel", Power Rating=100mW, Pricing 1="1=0.1, 10=0.034, 100=0.0139, 1000=0.00623, 2500=0.0054 (USD)", Radiation Hardening=No, REACH SVHC=Unknown, Stock 1=1811474, Supplier 1=Digi-Key, Termination=SMD/SMT, Voltage Rating (DC)=75V, Weight=7.1E-05oz, Width=0.033inch
R13 R15 R20: library part RMCF0603JT3K00, "RES 3K OHM 5% 1/10W 0603"
R14 R18: library part RMCF0603FT9K10, "RES 9.1K OHM 1% 1/10W 0603"
R19: library part RNCP0603FTD7K50, "RES 7.5K OHM 1% 1/8W 0603"
R21: library part MCT06030C1301FP500, "RES SMD 1.3K OHM 1% 1/8W 0603"
R22: library part RC0603FR-072K2L, "RES SMD 2.2K OHM 1% 1/10W 0603"
R23: library part RC0603FR-0733KL, "RES SMD 33K OHM 1% 1/10W 0603"
R24: library part ERA-3AEB4990V, "RES SMD 499 OHM 0.1% 1/10W 0603"
R26: library part ERA-3AEB202V, "RES SMD 2K OHM 0.1% 1/10W 0603", Case/Package=0603, Case Code (Metric)=1608, Manufacturer="Vishay Dale", Manufacturer Part Number=CRCW06031K00FKEA, Max Operating Temperature=155°C, Max Power Dissipation=100mW, Min Operating Temperature=-55°C, Package Quantity=10, Resistance=1kR, Supplier Part Number 1=541-1.00KHCT-ND, Temperature Coefficient=100ppm/°C, Tolerance=1%, Voltage Rating=75V, Case Code (Imperial)=0603, Category=Resistors, ComponentLink1Description=http://www.vishay.com/docs/20035/dcrcwe3.pdf?src-supplier=Digi-Key, ComponentLink1URL=http://www.vishay.com/docs/20035/dcrcwe3.pdf?src-supplier=Digi-Key, ComponentLink2Description=http://uk.rs-online.com/webdocs/0d98/0900766b80d98afc.pdf?src-supplier=RSComponents, ComponentLink2URL=http://uk.rs-online.com/webdocs/0d98/0900766b80d98afc.pdf?src-supplier=RSComponents, ComponentLink3Description=http://www.vishay.com/docs/20035/dcrcwe3.pdf?src-supplier=Avnet, ComponentLink3URL=http://www.vishay.com/docs/20035/dcrcwe3.pdf?src-supplier=Avnet, ComponentLink4Description=http://www.vishay.com/docs/20035/dcrcwe3.pdf?src-supplier=Avnet+Asia, ComponentLink4URL=http://www.vishay.com/docs/20035/dcrcwe3.pdf?src-supplier=Avnet+Asia, ComponentLink5Description=http://www.farnell.com/datasheets/2310790.pdf?src-supplier=Element14, ComponentLink5URL=http://www.farnell.com/datasheets/2310790.pdf?src-supplier=Element14, ComponentLink6Description=https://www.distrelec.biz/Web/Downloads/a_/en/flD-CRCW-e3_data_en.pdf?mime=application%2Fpdf&src-supplier=Distrelec, ComponentLink6URL=https://www.distrelec.biz/Web/Downloads/a_/en/flD-CRCW-e3_data_en.pdf?mime=application%2Fpdf&src-supplier=Distrelec, ComponentLink7Description=http://www.vishay.com/docs/20035/dcrcwe3.pdf?src-supplier=Future+Electronics, ComponentLink7URL=http://www.vishay.com/docs/20035/dcrcwe3.pdf?src-supplier=Future+Electronics, ComponentLink8Description=http://www.vishay.com/docs/20035/dcrcwe3.pdf?src-supplier=Avnet+Europe, ComponentLink8URL=http://www.vishay.com/docs/20035/dcrcwe3.pdf?src-supplier=Avnet+Europe, Composition="Thick Film", Contact Plating=Tin, Depth=0.85mm, Features="Automotive AEC-Q200", Height=0.45mm, Lead Free="Lead Free", Length=1.55mm, Military Standard=Not, Mount="Surface Mount", Number of Pins=2, Number of Terminations=2, Packaging="Tape and Reel", Power Rating=100mW, Pricing 1="1=0.1, 10=0.034, 100=0.0139, 1000=0.00623, 2500=0.0054 (USD)", Radiation Hardening=No, REACH SVHC=Unknown, Stock 1=1811474, Supplier 1=Digi-Key, Termination=SMD/SMT, Voltage Rating (DC)=75V, Weight=7.1E-05oz, Width=0.033inch
TP1 TP2 TP3: "Single layer pad TP"
U8 U14: "IC COMPAR PWR RRI DL PP 8VSSOP", Case/Package=VSSOP, Input Bias Current=50pA, Input Offset Voltage (Vos)=5mV, Manufacturer="Texas Instruments", Max Operating Temperature=125°C, Max Supply Current=40uA, Max Supply Voltage=5.5V, Min Operating Temperature=-40°C, Min Supply Voltage=2.7V, Nominal Supply Current=50uA, Package Quantity=80, Power Supply Rejection Ratio (PSRR)=85dB, Supplier Part Number 1=296-34992-ND, Common Mode Rejection Ratio=70dB, ComponentLink1Description=digikey.ca, ComponentLink1URL=https://www.digikey.ca/product-detail/en/texas-instruments/TLV3202AIDGK/296-34992-ND/3588984, ComponentLink2Description=https://datasheet.ciiva.com/12288/tlv3202-193866-12288098.pdf, ComponentLink2URL=https://datasheet.ciiva.com/12288/tlv3202-193866-12288098.pdf, ComponentLink3Description=https://datasheet.ciiva.com/23702/1645741-23702136.pdf, ComponentLink3URL=https://datasheet.ciiva.com/23702/1645741-23702136.pdf, ComponentLink4Description=https://datasheet.ciiva.com/8066/1645741-8066013.pdf, ComponentLink4URL=https://datasheet.ciiva.com/8066/1645741-8066013.pdf, Height=0.95mm, Hysteresis=1.2mV, Lead Free="Lead Free", Length=3.1mm, Manufacturer Part Number=TLV3202AIDGK, Max Input Current=50pA, Mount="Surface Mount", Number of Channels=2, Number of Elements=2, Number of Pins=8, Packaging=Rail/Tube, Pricing 1="1=1.77, 80=1.5, 160=1.278, 560=1.05, 1040=0.87 (USD)", Propagation Delay=50ns, Quiescent Current=50uA, Radiation Hardening=No, REACH SVHC="No SVHC", Response Time=0.047us, Stock 1=14534, Supplier 1=Digi-Key, Supplier 2=Digi-Key, Type="General Purpose", Width=3.1mm
U9: "IC GATE OR 2CH 2-INP US8", High Level Output Current=-32mA, Low Level Output Current=32mA, Manufacturer="ON Semiconductor", Manufacturer Part Number=NL27WZ32USG, Max Operating Temperature=85°C, Max Supply Voltage=5.5V, Min Operating Temperature=-40°C, Min Supply Voltage=1.65V, Operating Supply Voltage=3.25V, Output Current=50mA, Package Quantity=1, Quiescent Current=1uA, ComponentLink1Description=https://datasheet.ciiva.com/8277/nl27wz32-d-8277742.pdf?src-supplier=Avnet, ComponentLink1URL=https://datasheet.ciiva.com/8277/nl27wz32-d-8277742.pdf?src-supplier=Avnet, ComponentLink2Description=https://datasheet.ciiva.com/4820/nl27wz32-d-114831-4820790.pdf?src-supplier=Mouser, ComponentLink2URL=https://datasheet.ciiva.com/4820/nl27wz32-d-114831-4820790.pdf?src-supplier=Mouser, ComponentLink3Description=https://datasheet.ciiva.com/15090/getdatasheetpartid-69948-15090488.pdf?src-supplier=Verical, ComponentLink3URL=https://datasheet.ciiva.com/15090/getdatasheetpartid-69948-15090488.pdf?src-supplier=Verical, ComponentLink4Description=https://datasheet.ciiva.com/26864/nl27wz32usg-26864780.pdf?src-supplier=IIIC, ComponentLink4URL=https://datasheet.ciiva.com/26864/nl27wz32usg-26864780.pdf?src-supplier=IIIC, ComponentLink5Description=https://datasheet.ciiva.com/1872/nl27wz32-d-1872823.pdf?src-supplier=Digi-Key, ComponentLink5URL=https://datasheet.ciiva.com/1872/nl27wz32-d-1872823.pdf?src-supplier=Digi-Key, ComponentLink6Description=https://datasheet.ciiva.com/26049/nl27wz32-d-26049116.pdf?src-supplier=Avnet+Europe, ComponentLink6URL=https://datasheet.ciiva.com/26049/nl27wz32-d-26049116.pdf?src-supplier=Avnet+Europe, ComponentLink7Description=https://datasheet.ciiva.com/1872/nl27wz32-d-1872824.pdf?src-supplier=Digi-Key, ComponentLink7URL=https://datasheet.ciiva.com/1872/nl27wz32-d-1872824.pdf?src-supplier=Digi-Key, ComponentLink8Description=https://datasheet.ciiva.com/1872/nl27wz32-d-1872825.pdf?src-supplier=Digi-Key, ComponentLink8URL=https://datasheet.ciiva.com/1872/nl27wz32-d-1872825.pdf?src-supplier=Digi-Key, ComponentLink9Description=https://datasheet.ciiva.com/16471/nl27wz32-d-16471564.pdf?src-supplier=Future+Electronics, ComponentLink9URL=https://datasheet.ciiva.com/16471/nl27wz32-d-16471564.pdf?src-supplier=Future+Electronics, Contact Plating=Tin,Matte, Halogen Free="Halogen Free", Height=0.8mm, Lead Free="Lead Free", Length=2.4mm, Logic Function=OR, Mount="Surface Mount", Number of Circuits=2, Number of Elements=2, Number of Gates=2, Number of Inputs=2, Number of Outputs=1, Number of Pins=8, Packaging="Tape and Reel", Pricing 1="1=0.39000, 10=0.31700, 25=0.29000, 100=0.21570, 250=0.19548, 500=0.16176, 1000=0.12132 (USD)", Propagation Delay=6.2ns, Radiation Hardening=No, REACH SVHC="No SVHC", RoHS=Yes, Schmitt Trigger Input=No, Stock 1=5684, Supplier 1=Digi-Key, Supplier Part Number 1=NL27WZ32USGOSCT-ND, Turn-On Delay Time=5.2ns, Width=2.1mm
U10: "Dual 2-Input Positive-AND Gate", Case/Package=VSSOP, High Level Output Current=-32mA, Low Level Output Current=32mA, Manufacturer="Texas Instruments", Max Operating Temperature=125°C, Max Supply Voltage=5.5V, Min Operating Temperature=-40°C, Min Supply Voltage=1.65V, Package Quantity=1, Quiescent Current=10uA, Supplier Part Number 1=296-26615-1-ND, ComponentLink1Description=Digi-Key, ComponentLink1URL=https://www.digikey.ca/product-detail/en/texas-instruments/SN74LVC2G08DCUT/296-26615-1-ND/2255073, ComponentLink2Description=http://focus.ti.com/lit/ds/symlink/sn74lvc2g08.pdf?src-supplier=Element14, ComponentLink2URL=http://focus.ti.com/lit/ds/symlink/sn74lvc2g08.pdf?src-supplier=Element14, ComponentLink3Description=http://focus.ti.com/lit/ds/symlink/sn74lvc2g08.pdf?src-supplier=Avnet, ComponentLink3URL=http://focus.ti.com/lit/ds/symlink/sn74lvc2g08.pdf?src-supplier=Avnet, ComponentLink4Description=http://www.ti.com/general/docs/lit/getliterature.tsp?genericPartNumber=SN74LVC2G08&&fileType=pdf&src-supplier=Avnet, ComponentLink4URL=http://www.ti.com/general/docs/lit/getliterature.tsp?genericPartNumber=SN74LVC2G08&&fileType=pdf&src-supplier=Avnet, ComponentLink5Description=https://www.verical.com/server-webapp/html/getDatasheet?partID=48823&src-supplier=Verical, ComponentLink5URL=https://www.verical.com/server-webapp/html/getDatasheet?partID=48823&src-supplier=Verical, ComponentLink6Description=http://www.farnell.com/datasheets/1834894.pdf?src-supplier=Element14, ComponentLink6URL=http://www.farnell.com/datasheets/1834894.pdf?src-supplier=Element14, ComponentLink7Description=http://www.ti.com/lit/ds/symlink/sn74lvc2g08.pdf?src-supplier=Digi-Key, ComponentLink7URL=http://www.ti.com/lit/ds/symlink/sn74lvc2g08.pdf?src-supplier=Digi-Key, ComponentLink8Description=http://www.produktinfo.conrad.com/datenblaetter/1000000-1099999/001017175-da-01-en-IC_DU_2IN_PO_SN74LVC2G08DCUT_VSSOP_8_TID.pdf?src-supplier=Conrad, ComponentLink8URL=http://www.produktinfo.conrad.com/datenblaetter/1000000-1099999/001017175-da-01-en-IC_DU_2IN_PO_SN74LVC2G08DCUT_VSSOP_8_TID.pdf?src-supplier=Conrad, Contact Plating=Gold, Lead Free="Lead Free", Logic Function=AND, Manufacturer Part Number=SN74LVC2G08DCUT, Max Output Current=32mA, Mount="Surface Mount", Number of Bits=2, Number of Circuits=2, Number of Elements=2, Number of Gates=2, Number of Input Lines=2, Number of Inputs=2, Number of Output Lines=1, Number of Outputs=1, Number of Pins=8, Output Current=32mA, Packaging="Tape and Reel", Pricing 1="1=0.86, 10=0.769, 100=0.5994 (USD)", Propagation Delay=3.8ns, Radiation Hardening=No, REACH SVHC="No SVHC", Stock 1=2440, Supplier 1=Digi-Key, Termination=SMD/SMT, Turn-On Delay Time=3.8ns, Weight=0.000339oz
U11 U13: "The SN74AHC1G04 contains one inverter gate. The / device performs the Boolean function Y = A bar.", Case/Package=SC, High Level Output Current=-8mA, Low Level Output Current=8mA, Manufacturer="Texas Instruments", Manufacturer Part Number=SN74AHC1G04DCKR, Max Operating Temperature=125°C, Max Supply Voltage=5.5V, Min Operating Temperature=-40°C, Min Supply Voltage=2V, Package Quantity=1, Quiescent Current=1uA, Supplier Part Number 1=296-1090-1-ND, ComponentLink1Description=Digi-Key, ComponentLink1URL=https://www.digikey.com/product-detail/en/texas-instruments/SN74AHC1G04DCKR/296-1090-1-ND/276358, ComponentLink2Description=http://www.farnell.com/datasheets/1759812.pdf?src-supplier=Element14, ComponentLink2URL=http://www.farnell.com/datasheets/1759812.pdf?src-supplier=Element14, ComponentLink3Description=http://www.jameco.com/Jameco/Products/ProdDS/912915.pdf?src-supplier=Jameco, ComponentLink3URL=http://www.jameco.com/Jameco/Products/ProdDS/912915.pdf?src-supplier=Jameco, ComponentLink4Description=http://www.ti.com/lit/ds/symlink/sn74ahc1g04.pdf?src-supplier=Digi-Key, ComponentLink4URL=http://www.ti.com/lit/ds/symlink/sn74ahc1g04.pdf?src-supplier=Digi-Key, ComponentLink5Description=https://www.verical.com/server-webapp/html/getDatasheet?partID=53378&src-supplier=Verical, ComponentLink5URL=https://www.verical.com/server-webapp/html/getDatasheet?partID=53378&src-supplier=Verical, ComponentLink6Description=http://www.farnell.com/datasheets/2024272.pdf?src-supplier=Element14, ComponentLink6URL=http://www.farnell.com/datasheets/2024272.pdf?src-supplier=Element14, ComponentLink7Description=http://www.ti.com/general/docs/lit/getliterature.tsp?genericPartNumber=SN74AHC1G04&amp;&amp;fileType=pdf&src-supplier=Avnet+Asia, ComponentLink7URL=http://www.ti.com/general/docs/lit/getliterature.tsp?genericPartNumber=SN74AHC1G04&amp;&amp;fileType=pdf&src-supplier=Avnet+Asia, Contact Plating=Gold, Height=0.9mm, Lead Free="Lead Free", Length=2mm, Logic Function=Buffer,Inverter,Inverting, Max Output Current=8mA, Mount="Surface Mount", Number of Bits=1, Number of Circuits=1, Number of Elements=1, Number of Gates=1, Number of Inputs=1, Number of Pins=5, Output Current=8mA, Packaging="Tape and Reel", Pricing 1="1=0.43, 10=0.32, 100=0.1996, 500=0.13658, 1000=0.10506 (USD)", Propagation Delay=12ns, Radiation Hardening=No, REACH SVHC="No SVHC", Schmitt Trigger Input=No, Stock 1=120362, Supplier 1=Digi-Key, Termination=SMD/SMT, Turn-On Delay Time=10.6ns, Weight=8.8E-05oz, Width=1.25mm
U12: "Comparator Single R-R I/P 5.5V 5-Pin SC-70 T/R", Case/Package=SOT-23-5, Input Bias Current=5nA, Input Offset Voltage (Vos)=5mV, Manufacturer="Texas Instruments", Max Operating Temperature=125°C, Max Supply Current=40uA, Max Supply Voltage=5.5V, Min Operating Temperature=-40°C, Min Supply Voltage=2.7V, Nominal Supply Current=50uA, Package Quantity=3000, Power Supply Rejection Ratio (PSRR)=85dB, Supplier Part Number 1=296-36751-1-ND, Common Mode Rejection Ratio=85dB, ComponentLink1Description=https://datasheet.ciiva.com/29635/tlv3201-29635045.pdf?src-supplier=Digi-Key, ComponentLink1URL=https://datasheet.ciiva.com/29635/tlv3201-29635045.pdf?src-supplier=Digi-Key, ComponentLink2Description=https://datasheet.ciiva.com/2966/tlv3202-2966812.pdf?src-supplier=Avnet, ComponentLink2URL=https://datasheet.ciiva.com/2966/tlv3202-2966812.pdf?src-supplier=Avnet, Hysteresis=1.2mV, Lead Free="Lead Free", Manufacturer Part Number=TLV3201AIDCKR, Max Input Current=5nA, Mount="Surface Mount", Number of Channels=1, Number of Elements=1, Number of Pins=5, Packaging="Tape and Reel", Pricing 1="1=1.36000, 10=1.21500, 100=0.94760, 500=0.78280, 1000=0.61800 (USD)", Propagation Delay=50ns, Quiescent Current=40uA, Radiation Hardening=No, Response Time=0.047us, RoHS=Yes, Stock 1=34988, Supplier 1=Digi-Key, Type="General Purpose"

## Free pads (board coordinates)
  round 6 hole 4: ""(4,4) ""(4,66) ""(118.75,4) ""(118.75,66)

## Via types
v1: diameter 1, hole 0.7, Top Layer to Bottom Layer, tented both sides, 37 vias
v2: diameter 0.7, hole 0.4, Top Layer to Bottom Layer, tented both sides, 22 vias
v3: diameter 1.8, hole 1.32, Top Layer to Bottom Layer, 6 vias

## Nets (pads, with @x,y where several pads share a name; then routed paths per layer and width w, separated by ;. In a path a pad name is that pad's centre, name@x,y a point inside that pad or via, vN(x,y) a via of type N, cw(c..) or ccw(c..) an arc to the next point about the centre after c; other vN are vias at no path point)
5V: C5.2 C6.2 C7.1 C8.2 C9.1 C10.2 C11.2 M4.2 M4.3 R3.2 R5.2 R8.2 R10.2 R11.2 R12.2 R14.2 R16.2 R17.2 R19.2 R21.2 U8.8 U9.8 U10.8 U11.5 U12.5 U13.5 U14.8 | length 190.9
  Top Layer w0.25: C10.2 U10.8
  Top Layer w0.3: M4.3 8.3,36.75 8.3,10.425 15.225,3.5 24.45,3.5 ; v1(14.5,61) C11.2 14.6,62.85 U13.5 ; R3.2 24.318,3.632 24.45,3.5 ; C9.1 C9.1@26.5,62.775 ; R21.2 C9.1@26.5,62.775 ; U12.5 U12.5@28.363,63.35 ; v1(28.5,62.125) 28.313,62.313 28.313,63.3 U12.5@28.363,63.35 ; R5.2 43.268,3.507 43.275,3.5 ; v1@45.25,62.25 46,62.25 46.625,62.875 46.65,62.875 47,63.225 C8.2 47.1,63.35 U11.5 ; v1(54.5,62) 54.634,62.134 54.909,62.134 56,63.225 C10.2 ; R8.2 63.268,3.556 63.212,3.5 ; U9.8 C7.1 C7.1@69.5,65.25 ; R17.2 70.525,67.275 69.5,66.25 v1(69.5,66.096) C7.1@69.5,65.25 ; R16.2 72.75,62 70.274,64.476 69.85,64.476 69.738,64.588 69.738,65.013 C7.1@69.5,65.25 ; R10.2@82.035,7.821 82.268,7.588 82.268,4.093 81.675,3.5 63.212,3.5 ; v1(84.7,59.5) 85.425,60.225 R19.2 ; U8.8 87.725,65.475 C6.2 v1(87.75,68) ; v1(93.2,63.3) 93.2,66.7 v1(94.5,68) 95.5,68 95.725,67.775 R12.2 ; R11.2 98.975,62.475 99.766,61.684 99.766,61.034 v1(99.9,60.9) ; v1(106.5,60.25) 106.512,60.237 109.488,60.237 R14.2 ; U14.8 109.2,65.475 109.725,66 C5.2 v1(109.75,67.5) ; 24.45,3.5 43.275,3.5 ; C9.1@26.5,62.775 27.075,63.35 U12.5@28.363,63.35 ; 43.275,3.5 63.212,3.5
  Top Layer w2: M4.3 M4.2
  other v1: 45,62.25
12V: D2.1 D4.1 D6.1 D8.1 K1.5 K1.6 K2.6 K3.6 K4.6 M1.1 M4.1 | length 159.8
  Top Layer w0.3: 10.1,51.05 10.125,51.05 ; D2.1 27.625,15.8 K1.6 ; D4.1 46.375,15.625 K2.6 ; K3.6 65.375,15.425 D6.1 ; K4.6 84.125,15.675 D8.1
  Top Layer w2: M4.1 6.575,47.55 10.075,51.05 10.1,51.05 ; 10.125,51.05 13.275,54.2 M1.1 M1.1@33.935,54.2
  Bottom Layer w0.3: K2.6@46.25,20.65 K2.6 ; K3.6 K3.6@65.5,20.65 ; 67.85,18.05 67.975,18.175
  Bottom Layer w2: M1.1 33.704,54.104 33.504,54.104 25.225,45.825 25.225,38.175 K1.5 K1.6 30.35,18.05 46.25,18.05 ; K2.6@46.25,20.65 46.25,18.05 ; K3.6@65.5,20.65 65.5,18.05 ; K4.6 81.4,18.05 67.85,18.05 65.5,18.05 ; 46.25,18.05 65.5,18.05
BRAKE_REF_HIGH: R17.1 R18.2 U8.2 | length 6.2
  Top Layer w0.3: R17.1 R18.2 78.9,65.725 79.779,64.846 80.779,64.846 U8.2
CRT_REF_HIGH: R12.1 R13.2 U14.2 | length 5.5
  Top Layer w0.3: R12.1 R13.2 100.525,66.225 101.904,64.846 U14.2@102.409,64.846
CRT_REF_LOW: R14.1 R15.2 U14.5 | length 6
  Top Layer w0.3: U14.5 107.725,63.525 109.475,61.775 R14.1 R15.2
GND: C1.1 C2.1 C3.1 C4.1 C5.1 C6.1 C7.2 C8.1 C9.2 C10.1 C11.1 C12.1 D1.2 M2.4 pad. Q1.4 Q2.3 Q3.4 Q4.3 Q5.4 Q6.3 Q7.4 Q8.3 Q9.2 R2.2 R4.2 R7.2 R9.2 R13.1 R15.1 R18.1 R20.1 R22.1 R26.1 U8.4 U9.4 U10.4 U12.2 U13.3 U14.4 | length 19.6
  Top Layer w0.3: C11.1 C11.1@14.502,64.252 ; C12.1 C12.1@36,65.275 ; C10.1@55.976,64.726 C10.1 ; C7.2@69.5,63.2 v1(70.7,62) ; v1(75.3,63) 75.475,63 76.475,64 C3.1 ; v1(79.7,62.6) 79.834,62.734 79.834,63.036 80.322,63.525 U8.4
  Bottom Layer w0.3: v1(66,62) 66.189,62 66.489,61.7 70.211,61.7 70.511,62 v1(70.7,62) 71.7,63 79.111,63 79.511,62.6 v1(79.7,62.6)
  other v1: 106.552,2.473 99.75,9 55.252,11.747 45.152,11.773 65.227,11.798 26.152,11.874 76.252,11.997 36.252,12.247 84.2,12.925 95.326,14.922 38.25,15 57,15.5 13.5,34.25 22.5,35.75 114.815,48.046 13.5,51
NetC1_2: C1.2 C2.2 M2.1 R11.1 U14.3 U14.6 | length 36.3
  Top Layer w0.3: C1.2 C1.2@100.525,64.475 ; R11.1 C1.2@100.525,64.475 ; 118.66,57.59 113.5,62.75 111.025,62.75 109.775,64 C2.2 109.575,64.175 U14.6 U14.3 100.825,64.175 C1.2@100.525,64.475 ; M2.1 118.723,57.59
NetC3_2: C3.2 C4.2 M2.2 R16.1 U8.3 U8.6 | length 57.8